# EAGLE board stm board v4 (EAGLE 7.4.0)
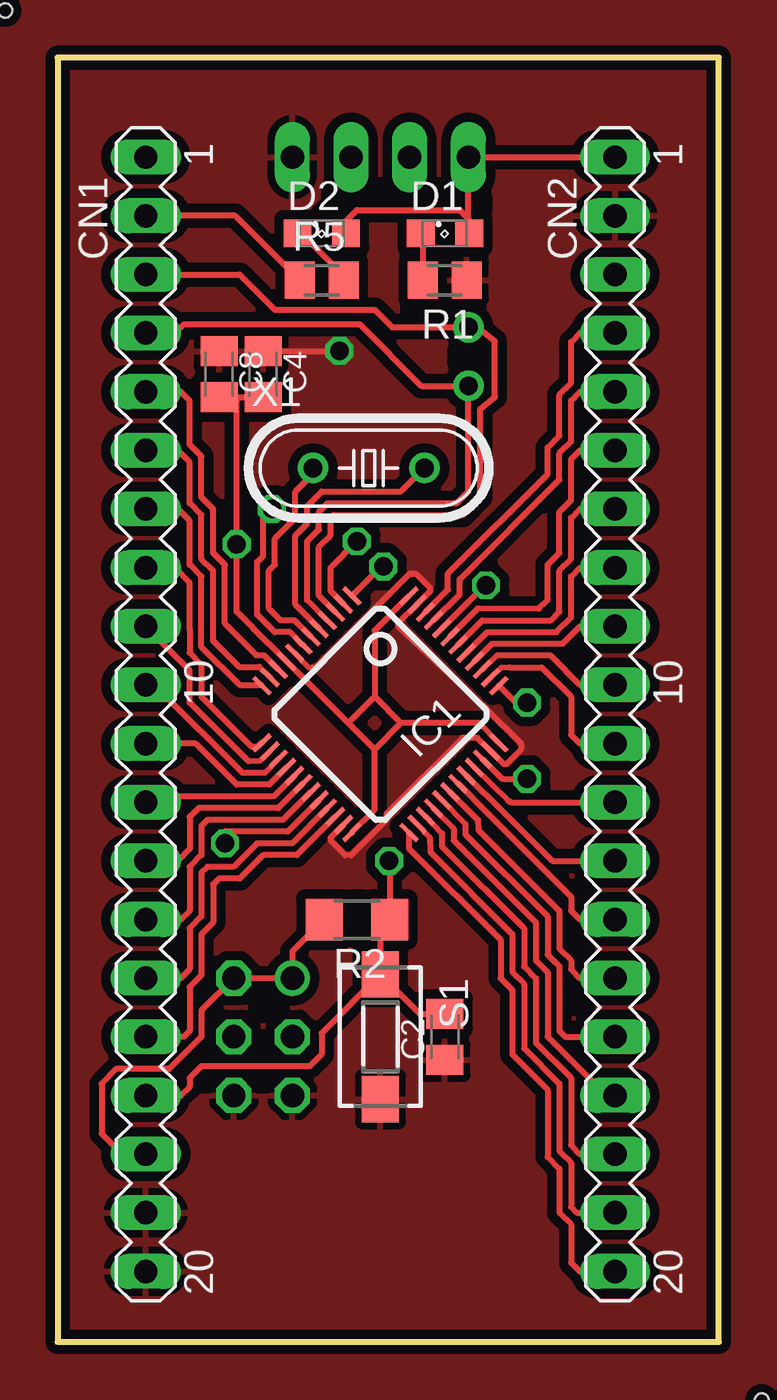
[diagram p0: board, top side]
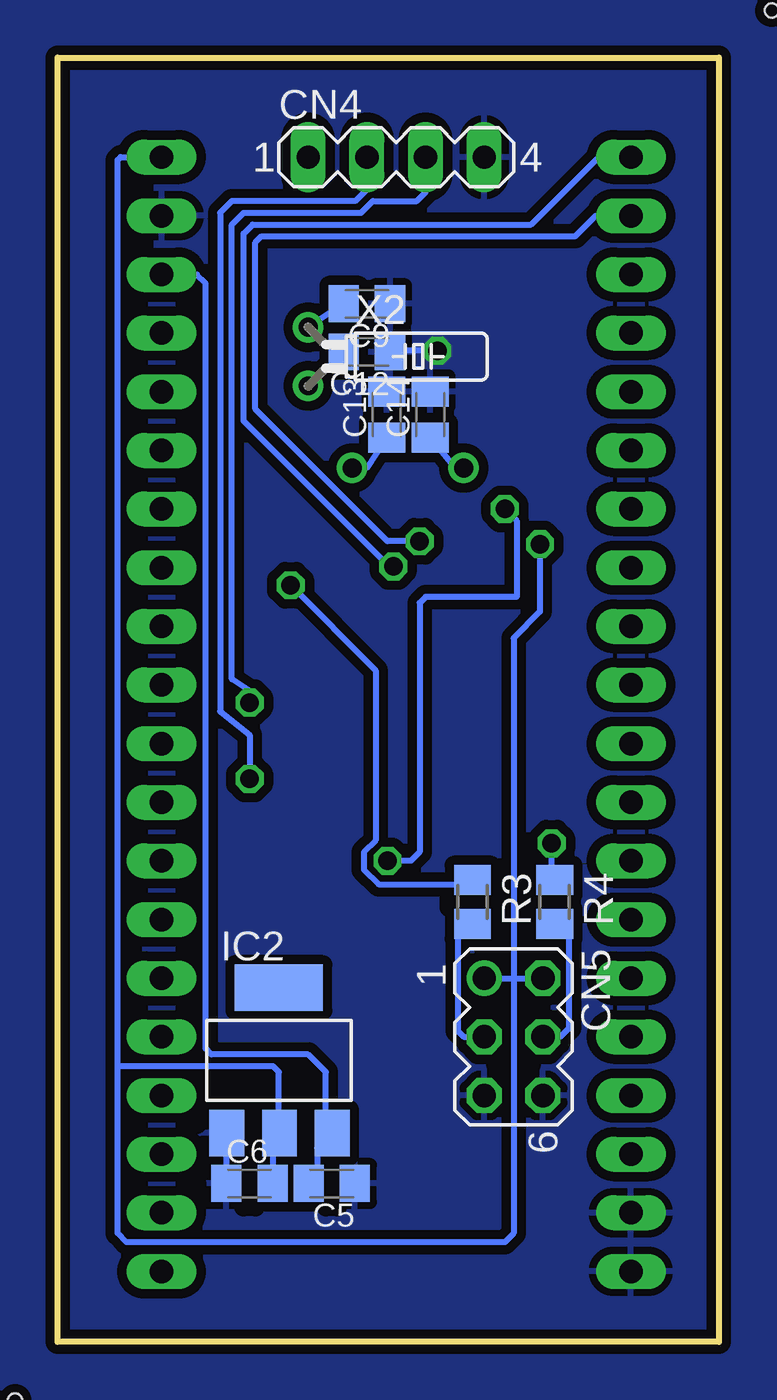
[diagram p1: board, bottom side, seen from below]

Size 28.63 x 55.62 mm. Coordinates in mm from the lower left corner, seen from the top.
Outline: 0,0 28.63,0 28.63,55.62 0,55.62 0,0
Copper layers (1*16): Top 0.035mm / dielectric 1.5mm / Bottom 0.035mm
Design rules "default *": minimum track width 10mil, minimum drill 24mil, track to track 10mil, track to pad 10mil, pad to pad 10mil, via to via 10mil, smd to smd 10mil, copper to edge 10mil, drill to drill 10mil, minimum pad ring 10mil, minimum via ring 8mil, stop-mask expansion 4mil, vias tented up to drill 0mil, thermal gap 12mil
Holes 0.6 mm at 30.48,-2.54 -2.29,57.66
tRestrict: area 2.5,9.4 to 2.8,9.7; area 4.8,14.5 to 5.1,14.7; area 8.9,12.4 to 9.1,12.7; area 4.8,17 to 5.1,17.3; area 4.8,19.6 to 5.1,19.8; area 4.8,22.1 to 5.1,22.4; area 4.8,32.3 to 5.1,32.5; area 4.8,34.8 to 5.1,35.1; area 4.8,37.3 to 5.1,37.6; area 4.8,39.9 to 5.1,40.1; area 22.9,42.4 to 23.1,42.7; area 22.9,39.9 to 23.1,40.1; 28 more areas; 4 lines
bRestrict: area 25.4,4.6 to 25.7,4.8; area 25.4,11.4 to 25.7,11.7; area 25.4,12.2 to 25.7,12.4; area 22.4,12.2 to 22.6,12.4; area 22.6,12.2 to 22.9,12.4; area 9.7,18.8 to 11.7,19.3; area 17.8,7.9 to 18,10.2; area 17.3,10.2 to 18,10.3; area 18,10.2 to 18.7,10.3; area 16.5,5.8 to 17,7.9; area 20.1,5.8 to 20.6,7.9; area 20.1,7.9 to 20.3,10.2; 44 more areas

## Footprints (pad centres in the part's own frame; a part is rotated, then mirrored left to right if it is on the bottom)
C0805K = smd 1.3 x 1.6: 1 -1,0; 2 1,0
MA20-1L = drill 1.016 long: 1 24.13,0; 2 21.59,0; 3 19.05,0; 4 16.51,0; 5 13.97,0; 6 11.43,0; 7 8.89,0; 8 6.35,0; 9 3.81,0; 10 1.27,0; 11 -1.27,0; 12 -3.81,0; 13 -6.35,0; 14 -8.89,0; 15 -11.43,0; 16 -13.97,0; 17 -16.51,0; 18 -19.05,0; 19 -21.59,0; 20 -24.13,0
MA04-1 = drill 1.016 long: 1 -3.81,0; 2 -1.27,0; 3 1.27,0; 4 3.81,0
MA03-2 = drill 1.016: 1 -2.54,-1.27 | drill 1.016 octagon: 2 -2.54,1.27; 3 0,-1.27; 4 0,1.27; 5 2.54,-1.27; 6 2.54,1.27
SML0805 = smd 1.2 x 1.2: A 1.05,0; C -1.05,0
TQFP48 = smd 0.2 x 1: 1 -2.75,-4.5; 2 -2.25,-4.5; 3 -1.75,-4.5; 4 -1.25,-4.5; 5 -0.75,-4.5; 6 -0.25,-4.5; 7 0.25,-4.5; 8 0.75,-4.5; 9 1.25,-4.5; 10 1.75,-4.5; 11 2.25,-4.5; 12 2.75,-4.5; 25 2.75,4.5; 26 2.25,4.5; 27 1.75,4.5; 28 1.25,4.5; 29 0.75,4.5; 30 0.25,4.5; 31 -0.25,4.5; 32 -0.75,4.5; 33 -1.25,4.5; 34 -1.75,4.5; 35 -2.25,4.5; 36 -2.75,4.5 | smd 1 x 0.2: 13 4.5,-2.75; 14 4.5,-2.25; 15 4.5,-1.75; 16 4.5,-1.25; 17 4.5,-0.75; 18 4.5,-0.25; 19 4.5,0.25; 20 4.5,0.75; 21 4.5,1.25; 22 4.5,1.75; 23 4.5,2.25; 24 4.5,2.75; 37 -4.5,2.75; 38 -4.5,2.25; 39 -4.5,1.75; 40 -4.5,1.25; 41 -4.5,0.75; 42 -4.5,0.25; 43 -4.5,-0.25; 44 -4.5,-0.75; 45 -4.5,-1.25; 46 -4.5,-1.75; 47 -4.5,-2.25; 48 -4.5,-2.75
SOT223 = smd 1.499 x 2.007: 1 -2.261,-3.15; 2 0.025,-3.15; 3 2.311,-3.15 | smd 3.81 x 2.007: 4 0,3.15
M0805 = smd 1.3 x 1.6: 1 -0.95,0; 2 0.95,0
R1206 = smd 1.6 x 1.803: 1 -1.422,0; 2 1.422,0
DTSM-3 = smd 2 x 1.6: 1 -2.7,0; 2 2.7,0
HC49/S = drill 0.813: 1 -2.413,0; 2 2.413,0
TC26H = drill 0.813: 1 -1.27,0; 2 1.27,0

## Placement (x,y rotation side)
C2  100n  [C0805K]  16.76,13.21 90 top
C4  100n  [C0805K]  8.89,41.91 270 top
C5  10u  [C0805K]  16.76,6.86 180 bottom
C6  10u  [C0805K]  20.32,6.86 0 bottom
C8  100n  [C0805K]  6.99,41.91 270 top
C9  100p  [C0805K]  15.24,44.96 180 bottom
C12  100p  [C0805K]  15.24,42.88 180 bottom
C13  12p  [C0805K]  14.38,40.16 90 bottom
C14  12p  [C0805K]  12.5,40.16 90 bottom
CN1  [MA20-1L]  3.81,27.18 90 top
CN2  [MA20-1L]  24.13,27.18 90 top
CN4  [MA04-1]  13.97,51.31 0 bottom
CN5  [MA03-2]  8.89,13.21 270 bottom
D1  red  [SML0805]  16.76,48.01 0 top
D2  blue  [SML0805]  11.43,48.01 0 top
IC1  STM32F10XCXT6  [TQFP48]  13.97,27.18 225 top
IC2  REG1117  [SOT223]  19.05,12.19 0 bottom
R1  510  [M0805]  16.76,45.97 180 top
R2  10k  [R1206]  12.95,18.29 180 top
R3  100k  [M0805]  10.67,19.05 270 bottom
R4  100k  [M0805]  7.11,19.05 270 bottom
R5  510  [M0805]  11.43,45.97 0 top
S1  DTSM-3  [DTSM-3]  13.97,13.21 270 top
X1  8M  [HC49/S]  13.46,37.85 0 top
X2  32k768  [TC26H]  17.78,42.67 270 bottom

## Library data of the parts
C2 C4-C6 C8 C9 C12-C14 R1-R5 = resistor
CN1 CN2 CN4 CN5 = con-lstb; OC_FARNELL: unknown; OC_NEWARK: unknown
D1 D2 = led
IC1 = stm32
IC2 = burr-brown; MPN: REG1117; OC_FARNELL: 1097566; OC_NEWARK: 14P6981
S1 = switch-tact
X1 = crystal; OC_FARNELL: 1667008; OC_NEWARK: unknown
X2 = crystal; OC_FARNELL: unknown; OC_NEWARK: unknown

## Nets
3VB: CN1.1 IC1.1
+3V3: C4.2 C6.2 C8.2 CN1.18 CN2.1 CN4.1 CN5.1 CN5.2 D1.A D2.A IC1.9 IC1.24 IC1.36 IC1.48 IC2.2 R2.2
+5V: C5.2 CN2.3 IC2.3
_BOOT0: IC1.44 R3.1
_BOOT1: IC1.20 R4.1
A0: CN1.5 IC1.10
A1: CN1.6 IC1.11
A2: CN1.7 IC1.12
A3: CN1.8 IC1.13
A4: CN1.9 IC1.14
A5: CN1.10 IC1.15
A6: CN1.11 IC1.16
A7: CN1.12 IC1.17
A8: CN2.16 IC1.29
A9: CN2.15 IC1.30
A10: CN2.14 IC1.31
A11: CN2.13 IC1.32
A12: CN2.12 IC1.33
A15: CN2.11 IC1.38
B0: CN1.13 IC1.18
B1: CN1.14 IC1.19
B3: CN2.10 IC1.39
B4: CN2.9 IC1.40
B5: CN2.8 IC1.41
B6: CN2.7 IC1.42
B7: CN2.6 IC1.43
B8: CN2.5 IC1.45
B9: CN2.4 IC1.46
B10: CN1.15 IC1.21
B11: CN1.16 IC1.22
B12: CN2.20 IC1.25
B13: CN2.19 IC1.26
B14: CN2.18 IC1.27
B15: CN2.17 IC1.28
BOOT0: CN5.3 R3.2
BOOT1: CN5.4 R4.2
C13: CN1.2 IC1.2 R5.1
C14: C9.2 CN1.3 IC1.3 X2.1
C15: C12.2 CN1.4 IC1.4 X2.2
DCLK: CN4.3 IC1.37
DIO: CN4.2 IC1.34
GND: C2.1 C4.1 C5.1 C6.1 C8.1 C9.1 C12.1 C13.2 C14.2 CN1.19 CN1.20 CN2.2 CN4.4 CN5.5 CN5.6 IC1.8 IC1.23 IC1.35 IC1.47 IC2.1 R1.1 S1.2
N$1: C13.1 IC1.5 X1.2
N$2: C14.1 IC1.6 X1.1
N$5: D1.C R1.2
N$6: D2.C R5.2
R: C2.2 CN1.17 IC1.7 R2.1 S1.1

## Tracks (layer width: path | path; a pad name or v marks a point on that pad's centre or on a via)
3VB  (via drill 0.8)
  Top 0.254: IC1.1 13.97,33.54 v14.1,33.58
  Bottom 0.254: CN1.1 5.21,51.31 8.13,48.39 20.19,48.39 20.57,48.01 20.57,39.88 14.35,33.66 14.28,33.66 v14.1,33.58
+3V3  (via drill 0.8)
  Top 0.229: IC1.48 13.72,30.81 | IC1.36 18.24,26.8 | IC1.9 9.15,30.23
  Top 0.254: IC1.9 12.58,26.8 | 12.58,26.8 13.72,25.66 13.72,25.65 | 13.72,30.81 13.72,27.94 | IC1.24 13.72,23.03 13.72,25.65 | 13.72,27.94 12.58,26.8 | 13.72,27.94 14.86,26.8 | 14.86,26.8 13.72,25.65 | 18.24,26.8 14.86,26.8 | 9.15,30.23 9.14,30.23 7.75,31.62 v7.75,34.54 7.75,40.78 7.87,40.91 | R2.2 10.16,16.92 CN5.1 CN5.2 6.22,14.35 6.22,13.21 4.83,11.81 2.54,11.81 1.91,11.18 1.91,9.02 2.79,8.13 CN1.18 | D2.A 12.45,48.04 12.45,48.51 12.95,49.02 17.4,49.02 17.81,48.61 D1.A 17.78,48.04 CN4.1 CN2.1 | C8.2 7.87,40.91 | 7.87,40.91 C4.2
  Bottom 0.254: 8.89,15.75 8.89,30.48 7.75,31.62 v7.75,34.54 | 8.89,15.75 CN5.2 | C6.2 19.32,8.75 IC2.2 19.05,9.07 19.05,11.68 19.3,11.94 26.03,11.94 | 26.03,11.94 26.03,51.18 25.91,51.31 CN2.1 | CN5.1 8.89,15.75 | 8.89,15.75 8.89,4.7 9.27,4.32 25.65,4.32 26.03,4.7 26.03,11.94
+5V
  Bottom 0.254: C5.2 17.76,6.87 17.4,7.24 17.4,8.38 IC2.3 17.02,9.32 17.02,11.68 17.78,12.45 21.97,12.45 22.23,12.7 22.23,45.85 22.61,46.23 CN2.3
_BOOT0  (via drill 0.8)
  Top 0.229: IC1.44 18.09,32.36
  Top 0.254: 18.09,32.36 v18.54,32.77
  Bottom 0.254: v18.54,32.77 14.86,29.08 14.86,21.72 15.37,21.21 15.37,20.45 14.73,19.81 11.3,19.81 11.12,20 R3.1
_BOOT1  (via drill 0.8)
  Top 0.229: IC1.20 9.95,22.1
  Top 0.254: 9.95,22.1 7.24,22.1 v7.24,21.59
  Bottom 0.254: R4.1 7.24,20.13 v7.24,21.59
A0
  Top 0.229: 8.93,29.74 IC1.10
  Top 0.254: CN1.5 5.33,41.15 5.72,40.77 5.72,38.86 6.22,38.35 6.22,36.58 6.73,36.07 6.73,34.16 7.24,33.66 7.24,31.12 8.59,29.74 8.93,29.74
A1
  Top 0.229: 8.73,29.23 IC1.11
  Top 0.254: CN1.6 5.21,38.61 5.72,38.1 5.72,36.32 6.22,35.81 6.22,33.91 6.73,33.4 6.73,30.35 7.85,29.23 8.73,29.23
A2
  Top 0.229: 8.81,28.45 IC1.12
  Top 0.254: CN1.7 5.21,36.07 5.72,35.56 5.72,33.66 6.22,33.15 6.22,30.1 7.87,28.45 8.81,28.45
A3
  Top 0.229: 8.84,25.95 8.67,25.78 8.38,25.78
  Top 0.254: CN1.8 5.08,33.53 5.72,32.89 5.72,30.86 5.72,29.84 6.22,29.34 6.22,27.94 8.38,25.78 | 8.84,25.95 IC1.13
A4
  Top 0.229: IC1.14 8.76,25.15 8.26,25.15
  Top 0.254: 8.26,25.15 5.72,27.69 5.72,29.08 CN1.9
A5
  Top 0.229: IC1.15 8.96,24.64
  Top 0.254: 8.96,24.64 8,24.64 4.32,28.32 3.94,28.32 CN1.10
A6
  Top 0.229: IC1.16 9.15,24.13
  Top 0.254: 9.15,24.13 7.75,24.13 5.97,25.91 CN1.11
A7
  Top 0.229: IC1.17 9.35,23.62
  Top 0.254: 9.35,23.62 4.45,23.62 4.19,23.37 CN1.12
A8
  Top 0.229: IC1.29 17.65,22.43
  Top 0.254: CN2.16 21.97,13.21 21.72,13.46 21.72,16.26 21.21,16.76 21.21,18.41 17.65,21.97 17.65,22.43
A9
  Top 0.229: IC1.30 18.19,22.61
  Top 0.254: CN2.15 22.61,15.75 22.23,16.13 22.23,16.51 21.72,17.02 21.72,18.67 18.21,22.17 18.19,22.61
A10
  Top 0.229: IC1.31 18.67,22.84
  Top 0.254: CN2.14 22.61,18.29 22.23,18.67 22.23,19.28 18.67,22.83 18.67,22.84
A11
  Top 0.229: IC1.32 19.3,22.94
  Top 0.254: 19.3,22.94 21.41,20.83 CN2.13
A12
  Top 0.229: IC1.33 19.52,23.42
  Top 0.254: 19.52,23.42 19.56,23.42 19.61,23.37 CN2.12
A15
  Top 0.229: IC1.38 19.21,29.21 19.56,29.21
  Top 0.254: CN2.11 22.61,25.91 22.23,26.29 22.23,27.94 20.96,29.21 19.56,29.21
B0
  Top 0.229: IC1.18 9.55,23.11
  Top 0.254: 9.55,23.11 6.1,23.11 5.72,22.73 5.72,21.34 5.21,20.83 CN1.13
B1
  Top 0.229: IC1.19 9.75,22.61
  Top 0.254: 9.75,22.61 6.48,22.61 6.22,22.35 6.22,21.08 5.72,20.57 5.72,18.67 5.33,18.29 CN1.14
B3
  Top 0.229: IC1.39 19.01,29.72
  Top 0.254: CN2.10 22.61,28.45 21.34,29.72 19.01,29.72
B4
  Top 0.229: 18.8,30.23 IC1.40
  Top 0.254: CN2.9 22.61,30.99 21.84,30.23 18.8,30.23
B5
  Top 0.229: IC1.41 18.59,30.73
  Top 0.254: 18.59,30.73 21.59,30.73 22.23,31.37 22.23,33.15 22.61,33.53 CN2.8
B6
  Top 0.229: IC1.42 18.39,31.24
  Top 0.254: 18.39,31.24 21.34,31.24 21.72,31.62 21.72,33.4 22.23,33.91 22.23,35.69 22.61,36.07 CN2.7
B7
  Top 0.229: IC1.43 18.21,31.77
  Top 0.254: CN2.6 22.61,38.61 22.23,38.23 22.23,36.45 21.72,35.94 21.72,34.16 21.21,33.66 21.21,32.13 20.83,31.75 18.21,31.77
B8
  Top 0.229: IC1.45 17.4,32.38
  Top 0.254: 17.4,32.38 17.4,33.02 21.72,37.34 21.72,38.48 22.23,38.99 22.23,40.77 22.61,41.15 CN2.5
B9
  Top 0.229: IC1.46 16.89,32.57
  Top 0.254: 16.89,32.57 16.89,33.27 21.21,37.59 21.21,38.73 21.72,39.24 21.72,41.02 22.23,41.53 22.23,43.31 22.61,43.69 CN2.4
B10
  Top 0.229: IC1.21 10.15,21.59
  Top 0.254: 10.15,21.59 8.64,21.59 7.62,20.57 6.48,20.57 6.22,20.32 6.22,18.41 5.72,17.91 5.72,16.13 5.33,15.75 CN1.15
B11
  Top 0.229: IC1.22 10.35,21.08
  Top 0.254: 10.35,21.08 8.89,21.08 7.87,20.07 6.99,20.07 6.73,19.81 6.73,18.16 6.22,17.65 6.22,15.88 5.72,15.37 5.72,13.46 5.46,13.21 CN1.16
B12
  Top 0.254: CN2.20 22.61,3.05 22.23,3.43 22.23,5.08 21.72,5.59 21.72,7.49 21.21,8 21.21,10.92 19.69,12.45 19.69,15.24 19.18,15.75 19.18,17.4 15.21,21.37 IC1.25
B13
  Top 0.229: IC1.26 16.1,21.84
  Top 0.254: CN2.19 22.48,5.59 22.23,5.84 22.23,7.75 21.72,8.26 21.72,11.18 20.19,12.7 20.19,15.49 19.69,16 19.69,17.65 16.13,21.21 16.1,21.84
B14
  Top 0.229: IC1.27 15.93,22.76 16.64,22.02
  Top 0.254: CN2.18 22.61,8.13 22.23,8.51 22.23,11.43 20.7,12.95 20.7,15.75 20.19,16.26 20.19,17.91 16.64,21.46 16.64,22.02
B15
  Top 0.229: IC1.28 17.15,22.23
  Top 0.254: CN2.17 23.75,10.67 21.21,13.21 21.21,16 20.7,16.51 20.7,18.16 17.15,21.72 17.15,22.23
BOOT0
  Bottom 0.254: R3.2 11.3,17.47 11.3,13.46 11.05,13.21 CN5.3
BOOT1
  Bottom 0.254: CN5.4 6.86,13.21 6.48,13.59 6.48,17.65 6.92,18.1 R4.2
C13  (via drill 0.8)
  Top 0.229: IC1.2 11.81,32.52
  Top 0.254: 11.81,32.52 11.81,33.53 v12.95,34.67 | R5.1 7.69,48.77 CN1.2
  Bottom 0.254: 12.83,34.67 v12.95,34.67 14.35,34.67 20.07,40.39 20.07,47.62 19.81,47.88 6.22,47.88 5.33,48.77 CN1.2
C14
  Top 0.229: IC1.3 11.3,32.32
  Top 0.254: 11.3,32.32 11.3,34.42 11.81,34.92 11.81,35.69 11.94,35.81 17.53,35.81 18.29,36.58 18.29,40.39 18.92,40.92 18.92,43.33 18.16,43.94 X2.1 14.48,43.94 13.72,44.7 9.4,44.7 7.87,46.23 CN1.3
  Bottom 0.254: C9.2 X2.1
C15
  Top 0.229: IC1.4 10.8,32.12
  Top 0.254: 10.8,32.12 10.8,34.67 11.3,35.18 11.3,35.94 11.68,36.32 17.27,36.32 17.78,36.83 X2.2 15.75,41.4 13.08,44.07 5.46,44.07 5.08,43.69 CN1.4
  Bottom 0.254: C12.2 17.41,41.71 X2.2
DCLK  (via drill 0.8)
  Top 0.254: IC1.37 19.83,27.69 v20.32,27.69
  Bottom 0.254: v20.32,27.69 20.32,28.19 21.08,28.7 21.08,48.39 20.57,48.89 15.49,48.89 14.99,49.4 13.08,49.4 12.7,49.78 CN4.3
DIO  (via drill 0.8)
  Top 0.229: IC1.34 19.24,24.38 19.3,24.38
  Top 0.254: 19.3,24.38 v20.32,24.38
  Bottom 0.254: CN4.2 15.24,49.91 15.75,49.4 21.08,49.4 21.59,48.89 21.59,27.3 20.32,26.29 v20.32,24.38
GND  (via drill 0.8)
  Top 0.229: IC1.8 10.88,29.21 11.18,29.21 | IC1.47 16.13,32.52 | IC1.35 19.31,25.02 | IC1.23 11.81,21.84
  Top 0.254: 11.18,29.21 15.24,33.27 15.49,33.27 16.13,32.64 16.13,32.52 | IC1.47 14.73,31.12 14.73,30.99 18.54,27.43 20.07,25.91 20.07,25.65 19.43,25.02 19.31,25.02 | IC1.35 18.17,26.16 17.53,26.16 14.22,22.86 14.22,22.61 12.7,21.08 12.45,21.08 11.81,21.72 11.81,21.84 | C4.1 12.19,42.91 v12.19,42.93
  Bottom 0.254: 14.22,42.4 C12.1 13.73,42.93 v12.19,42.93 | C6.1 IC2.1 21.34,9.02
  pour Top (isolate 0.406): 28.19,0.51 0.25,0.51 0.25,55.37 28.19,55.37
  pour Bottom (isolate 0.406): 28.19,0.51 0.51,0.51 0.51,55.12 28.19,55.12
N$1
  Top 0.229: IC1.5 10.29,31.92
  Top 0.254: 10.29,31.92 10.29,34.92 10.8,35.43 10.8,36.2 11.43,36.83 14.86,36.83 X1.2
  Bottom 0.254: C13.1 15.26,37.85 X1.2
N$2
  Top 0.229: IC1.6 10.26,31.24
  Top 0.254: X1.1 11.05,37.59 10.29,36.83 10.29,35.69 9.4,34.8 9.4,33.66 9.14,33.4 9.14,31.75 9.65,31.24 10.26,31.24
  Bottom 0.254: C14.1 11.41,37.85 X1.1
N$3
  pour Bottom (isolate 0.406): 31.5,-3.56 -3.3,-3.56 -3.3,58.67 31.5,58.67
N$5
  Top 0.254: D1.C 15.81,47.91 R1.2
N$6
  Top 0.254: R5.2 12.38,46.17 10.8,47.75 10.63,47.75 D2.C
OUT
  pour Top (isolate 0.406): 31.5,-3.56 -3.3,-3.56 -3.3,58.67 31.5,58.67
R  (via drill 0.8)
  Top 0.254: v14.35,20.83 14.38,20.68 R2.1 13.97,17.88 S1.1 | S1.1 11.43,13.37 11.43,12.45 10.92,11.94 6.22,11.94 5.72,11.43 5.72,11.05 5.33,10.67 CN1.17 | S1.1 15.67,14.21 C2.2 | IC1.7 10.06,30.73 9.4,30.73 8.64,31.5 8.64,33.78 8.89,34.04 8.89,35.69 v9.27,36.07
  Bottom 0.254: v14.35,20.83 13.34,20.83 12.95,21.21 12.95,32 12.7,32.26 8.76,32.26 8.76,35.56 v9.27,36.07

## Text on the board
boardDescription: GND | DCLK | DIO | 3V3 | 3VB | 3V3 | C13 | GND | C14 | 5V | C15 | B9 | A0 | B8 | A1 | B7 | A2 | B6 | A3 | B5 | A4 | B4 | A5 | B3 | A15 | A6 | A7 | A12 | A11 | B0 | B1 | A10 | B10 | A9 | B11 | A8 | R | B15 | B14 | 3V3 | GND | B13 | B12 | GND
tBoardDescriptiom: 3V3 | 3V3 | BT1 | BT0 | STM / 32f103 / MiniBoard / Sh4DoV | GND | GND